# Altium PCB L1211 TOP V2.0.PcbDoc
Units mm, origin at the board's own origin, x right, y up, seen from the top; angles counter-clockwise.
Board outline 57.3 x 42.5 mm, 2 copper layers (Top Layer, Bottom Layer), stack 0.325 mm thick; 114 components, 65 nets, 318 pads, 231 vias.
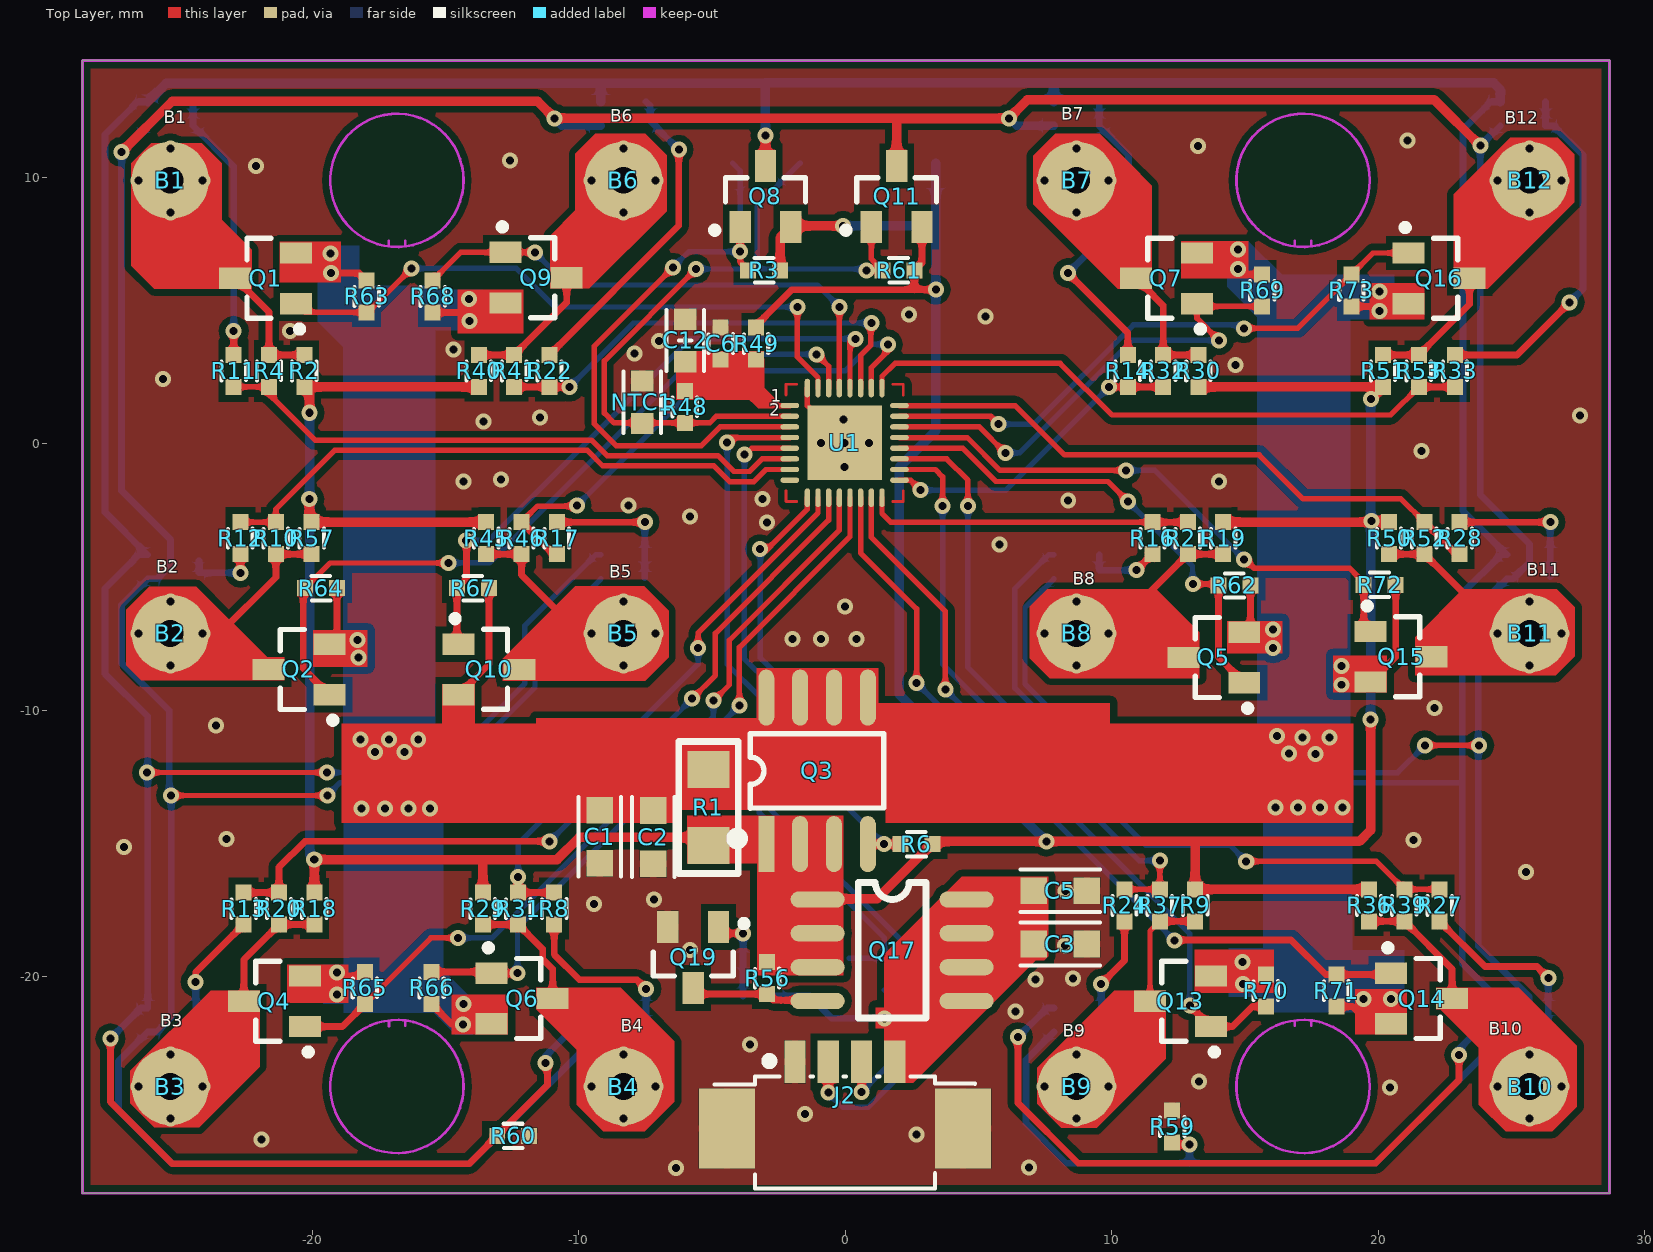
[diagram p0: Top Layer view]
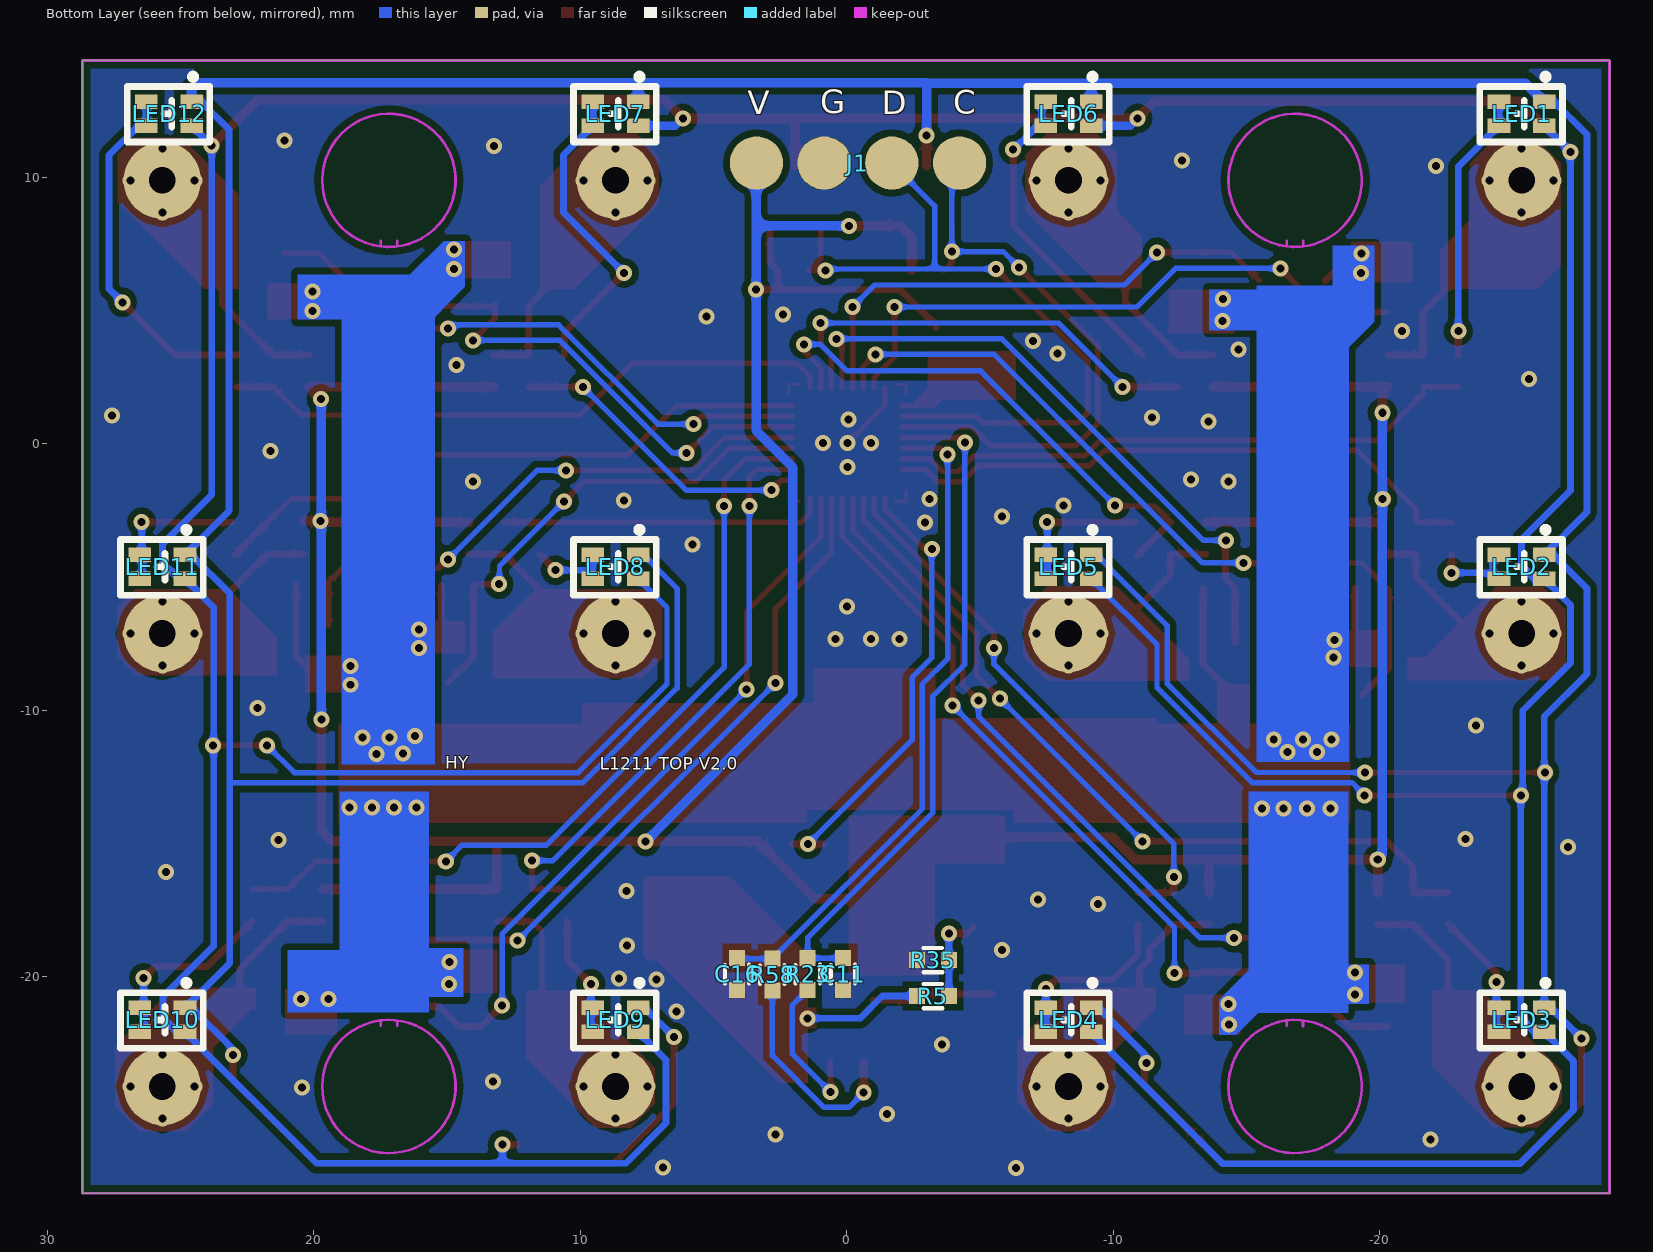
[diagram p1: Bottom Layer view, seen from below]

## Layer stack, top to bottom
Top Solder: solder mask 0.0102, Solder Resist, Dk 3.5
Top Layer: signal copper 0.0356
Dielectric 1: core 0.254, FR-4, Dk 4.2
Bottom Layer: signal copper 0.0356
Bottom Solder: solder mask 0.0102, Solder Resist, Dk 3.5

## Board outline
-28.614,-28.12 -28.614,14.38 28.686,14.38 28.686,-28.12

## Design rules (kind name [scope] priority, off if disabled: settings)
Clearance Poly [InPolygon] p1: gap=0.254
Clearance [All] p2: gap=0.178
MinimumSolderMaskSliver [All] p1: minsoldermaskwidth=0.025
PolygonConnect [isvia] p1: connectstyle=Direct reliefconductorwidth=0.254 reliefentries=4 polygonreliefangle="90 Angle" airgapwidth=0.254
RoutingVias [All] p1: holewidth=0.4 width=0.8 viastyle="Through Hole" minholewidth=0.3 minwidth=0.6 maxholewidth=0.6 maxwidth=1.2
SilkToSilkClearance [All] p1: silktosilkclearance=0.025
SilkToSolderMaskClearance [IsPad] p1: minsilkscreentomaskgap=0.025 clearancetoexposedcopper=TRUE
SolderMaskExpansion [All] p1: expansion=0.102
Width [All] p1: maxlimit=2.54 minlimit=0.203 preferedwidth=0.305
27 further rules are at their usual default settings.

## Components (designator, comment, footprint, x,y, rotation, side; value= is the part's Value field where it differs from the comment)
B1 "DC1" POPOPIN01 -25.314,9.88 r0 top locked
B2 "DC1" POPOPIN01 -25.314,-7.12 r0 top locked
B3 "DC1" POPOPIN01 -25.314,-24.12 r0 top
B4 "DC1" POPOPIN01 -8.314,-24.12 r0 top locked
B5 "DC1" POPOPIN01 -8.314,-7.12 r0 top locked
B6 "DC1" POPOPIN01 -8.314,9.88 r0 top locked
B7 "DC1" POPOPIN01 8.686,9.88 r0 top locked
B8 "DC1" POPOPIN01 8.686,-7.12 r0 top locked
B9 "DC1" POPOPIN01 8.686,-24.12 r0 top locked
B10 "DC1" POPOPIN01 25.686,-24.12 r0 top locked
B11 "DC1" POPOPIN01 25.686,-7.12 r0 top locked
B12 "DC1" POPOPIN01 25.686,9.88 r0 top locked
C1 "22uF/6.3V" 0805L -9.207,-14.748 r90 top
C2 "22uF/6.3V" 0805l -7.195,-14.761 r90 top
C3 "22uF/6.3V" 0805l 8.075,-18.775 r180 top
C5 "22uF/6.3V 0603" 0805l 8.075,-16.77 r180 top
C6 "104" R0402 -4.664,3.755 r270 top
C11 "104" R0402 0.15,-19.9 r90 bottom
C12 "22UF" "C 0603_L" -6,3.875 r270 top
C16 "104" R0402 4.125,-19.9 r90 bottom
J1 "shaolu-4P" shaolu-4P -0.414,10.53 r180 bottom
J2 "PTP-4P" PTP-4P 0,-24.445 r0 top
LED1 "2P" "LED 0606"#1 -25.314,12.38 r180 bottom locked
LED2 "2P" "LED 0606"#1 -25.314,-4.62 r180 bottom locked
LED3 "2P" "LED 0606"#1 -25.314,-21.62 r180 bottom locked
LED4 "2P" "LED 0606"#1 -8.314,-21.62 r180 bottom locked
LED5 "2P" "LED 0606"#1 -8.314,-4.62 r180 bottom locked
LED6 "2P" "LED 0606"#1 -8.314,12.38 r180 bottom locked
LED7 "2P" "LED 0606"#1 8.686,12.38 r180 bottom locked
LED8 "2P" "LED 0606"#1 8.686,-4.62 r180 bottom locked
LED9 "2P" "LED 0606"#1 8.686,-21.62 r180 bottom locked
LED10 "2P" "LED 0606"#1 25.686,-21.62 r180 bottom locked
LED11 "2P" "LED 0606"#1 25.686,-4.62 r180 bottom locked
LED12 "2P" "LED 0606"#2 25.686,12.38 r180 bottom locked
NTC1 "CMFA103J3950HANT" 0603L -7.614,1.555 r270 top
Q1 "AO3401" SOT23-3N -21.739,6.205 r90 top
Q2 "AO3401" SOT23-3N -20.489,-8.47 r90 top
Q3 "4435" SOP8_M -1.05,-12.275 r90 top
Q4 "AO3401" SOT23-3N -21.414,-20.92 r90 top
Q5 "AO3401" SOT23-3N 13.836,-8.02 r90 top
Q6 "AO3401" SOT23-3N -12.114,-20.82 r270 top
Q7 "AO3401" SOT23-3N 12.061,6.205 r90 top
Q8 "AO3401" SOT23-3N -2.985,9.28 r0 top
Q9 "AO3401" SOT23-3N -11.589,6.23 r270 top
Q10 "AO3401" SOT23-3N -13.364,-8.47 r270 top
Q11 "AO3401" SOT23-3N 1.936,9.28 r0 top
Q13 "AO3401" SOT23-3N 12.586,-20.92 r90 top
Q14 "AO3401" SOT23-3N 21.636,-20.82 r270 top
Q15 "AO3401" SOT23-3N 20.861,-7.995 r270 top
Q16 "AO3401" SOT23-3N 22.286,6.205 r270 top
Q17 "9435A" SOP8 -1,-17.075 r0 top
Q19 "SS8050" SOT23-3N -5.7,-19.275 r180 top
R1 "2R" "R 1206_L" -5.125,-13.625 r270 top
R2 "100K" R0402 -20.289,2.73 r270 top
R3 "10K" R0402 -3.039,6.505 r180 top
R4 "10K,1%" R0402 -21.614,2.73 r90 top
R5 "3K" R0402 -3.225,-20.725 r180 bottom
R6 "10K" R0402 2.675,-15.025 r0 top
R8 "5.2k" R0402 -10.914,-17.443 r90 top
R9 "100K" R0402 13.136,-17.32 r90 top
R10 "10K,1%" R0402 -21.356,-3.545 r270 top
R11 "5.2k" R0402 -22.939,2.73 r270 top
R12 "5.2k" R0402 -22.689,-3.545 r90 top
R13 "5.2k" R0402 -22.564,-17.443 r90 top
R14 "5.2k" R0402 10.611,2.73 r90 top
R16 "5.2k" R0402 11.536,-3.545 r270 top
R17 "5.2k" R0402 -10.814,-3.545 r270 top
R18 "100K" R0402 -19.914,-17.443 r90 top
R19 "100K" R0402 14.186,-3.545 r90 top
R20 "10K,1%" R0402 -21.239,-17.443 r270 top
R21 "10K,1%" R0402 12.861,-3.545 r270 top
R22 "5.2k" R0402 -11.089,2.73 r270 top
R23 "1K" R0402 1.475,-19.9 r90 bottom
R24 "5.2k" R0402 10.486,-17.32 r270 top
R27 "5.2k" R0402 22.311,-17.32 r270 top
R28 "5.2k" R0402 23.061,-3.545 r90 top
R29 "100K" R0402 -13.589,-17.443 r90 top
R30 "100K" R0402 13.261,2.73 r270 top
R31 "10K,1%" R0402 -12.264,-17.443 r270 top
R32 "10K,1%" R0402 11.936,2.73 r90 top
R33 "5.2k" R0402 22.886,2.73 r90 top
R35 "1K" R0402 -3.225,-19.375 r180 bottom
R36 "100K" R0402 19.661,-17.32 r90 top
R37 "10K,1%" R0402 11.811,-17.32 r270 top
R39 "10K,1%" R0402 20.986,-17.32 r270 top
R40 "100K" R0402 -13.739,2.73 r270 top
R41 "10K,1%" R0402 -12.414,2.73 r90 top
R45 "100K" R0402 -13.464,-3.545 r90 top
R46 "10K,1%" R0402 -12.139,-3.545 r270 top
R48 "10k" R0402 -6.014,1.381 r270 top
R49 "0R" R0402 -3.339,3.755 r90 top
R50 "100K" R0402 20.411,-3.545 r90 top
R51 "100K" R0402 20.186,2.73 r270 top
R52 "10K,1%" R0402 21.736,-3.545 r270 top
R53 "10K,1%" R0402 21.528,2.73 r90 top
R56 "10K" R0402 -2.925,-20.05 r90 top
R57 "100K" R0402 -20.014,-3.545 r90 top
R58 "1K" R0402 2.8,-19.925 r90 bottom
R59 "1k" R0402 12.275,-25.625 r270 top
R60 "1k" R0402 -12.45,-25.975 r0 top
R61 "10K" R0402 2.011,6.505 r180 top
R62 "10K" R0402 14.611,-5.32 r180 top
R63 "10K" R0402 -17.95,5.525 r270 top
R64 "10K" R0402 -19.664,-5.42 r180 top
R65 "10K" R0402 -18.014,-20.42 r270 top
R66 "10K" R0402 -15.514,-20.42 r90 top
R67 "10K" R0402 -13.964,-5.42 r180 top
R68 "10K" R0402 -15.475,5.525 r90 top
R69 "10K" R0402 15.65,5.75 r270 top
R70 "10K" R0402 15.786,-20.52 r270 top
R71 "10K" R0402 18.436,-20.52 r90 top
R72 "10K" R0402 20.061,-5.295 r180 top
R73 "10K" R0402 19,5.75 r90 top
U1 "SC8F096" QFN-32-4*4 -0.014,0.03 r0 top

## Footprints (in the part's own frame and the unit in brackets; to place one, negate y for a bottom-side part, rotate by r counter-clockwise, add the part's x,y. Pads: shape width x height; smd on the part's side, far side on the other; paste and mask are expansions set on the pad)
0603L [mm]
  rect 0.8x0.85 smd: 1(-0.8,0) 2(0.8,0)
  silkscreen extent -1.15,-0.7 1.15,0.7
0805L [mm]
  rect 1x1 smd: 1(-1,0) 2(1,0)
  silkscreen extent -1.5,-0.8 1.5,0.8
0805l [mm]
  rect 1x1 smd: 1(-1,0) 2(1,0)
  silkscreen extent -1.5,-0.8 1.5,0.8
"C 0603_L" [mm] "无极性贴片电容"
  rect 0.8x0.85 smd: 1(-0.8,0) 2(0.8,0)
  silkscreen extent -1.15,-0.7 1.15,0.7, body extent -0.72,-0.41 0.88,0.41, height 0.81
"LED 0606"#1 [mm]
  rect 0.85x0.55 smd: 1(0.85,0.45) 2(-0.85,0.45) 3(0.85,-0.45) 4(-0.85,-0.45)
  silkscreen extent -1.57,-1.06 1.53,1.49
"LED 0606"#2 [mm]
  rect 0.85x0.55 smd: 1(1.1,0.45) 2(-0.6,0.45) 3(1.1,-0.45) 4(-0.6,-0.45)
  silkscreen extent -1.32,-1.06 1.78,1.49
POPOPIN01 [mm] "铜柱/顶针焊盘"
  round 2.9 hole 1: 1(0,0)
  round 1.8 on Bottom Solder: 9(0,0)
PTP-4P [mm]
  rect 0.8x1.6 smd paste+0 mask+0.05: 1(-1.88,1.25) 2(-0.63,1.25) 3(0.62,1.25) 4(1.87,1.25)
  rect 2.1x3 smd paste+0 mask+0.05: 5(4.43,-1.25) 6(-4.43,-1.25)
  silkscreen extent -4.9,-3.5 4.87,1.43
QFN-32-4*4 [mm]
  oval 0.7x0.2 smd paste-100 mask+0.051: 1(-2.057,1.4) 2(-2.057,1) 3(-2.057,0.6) 4(-2.057,0.2) 5(-2.057,-0.2) 6(-2.057,-0.6) 7(-2.057,-1) 8(-2.057,-1.4) 17(2.057,-1.4) 18(2.057,-1) 19(2.057,-0.6) 20(2.057,-0.2) 21(2.057,0.2) 22(2.057,0.6) 23(2.057,1) 24(2.057,1.4)
  oval 0.2x0.7 smd paste-100 mask+0.051: 9(-1.4,-2.057) 10(-1,-2.057) 11(-0.6,-2.057) 12(-0.2,-2.057) 13(0.2,-2.057) 14(0.6,-2.057) 15(1,-2.057) 16(1.4,-2.057) 25(1.4,2.057) 26(1,2.057) 27(0.6,2.057) 28(0.2,2.057) 29(-0.2,2.057) 30(-0.6,2.057) 31(-1,2.057) 32(-1.4,2.057)
  rect 2.8x2.8 smd paste-100 mask+0.051: 33(0,0)
  Top Layer lines w0.1: -2.2,1.799 -2.2,2.2 -1.8,2.2 ; -2.2,-1.8 -2.2,-2.201 -1.8,-2.201 ; 1.8,-2.2 2.2,-2.2 2.2,-1.8 ; 1.8,2.2 2.2,2.2 2.2,1.8
  body extent -2.51,-2.54 2.51,2.48, height 0.8
R0402 [mm]
  rect 0.6x0.6 smd paste-100 mask+0.051: 1(-0.6,0) 2(0.6,0)
  silkscreen extent -0.36,-0.46 0.36,0.46
"R 1206_L" [mil] "1/4W贴片电阻"
  rect 55x62 smd: 1(-55.12,0) 2(57.09,0)
  silkscreen extent -96,-44 98,44, body extent -63,-31 63,32, height 22
shaolu-4P [mm]
  round 2 smd: 1(-3.81,0) 2(-1.27,0) 3(1.27,0) 4(3.81,0)
SOP8 [mil] "（蒜米工坊）"
  oval 80x24 smd: 1(-1,-1) 2(-1,-51) 3(-1,-101) 4(-1,-151) 5(219,-151) 6(219,-101) 7(219,-51) 8(219,-1)
  silkscreen extent 59,-176 159,24, body extent -4,-174 234,24, height 63
SOP8_M [mm] "5*6*1.8mm（长宽高）"
  rect 2.1x0.6 smd: 1(-2.75,1.905)
  oval 2.1x0.6 smd: 2(-2.75,0.635) 3(-2.75,-0.635) 4(-2.75,-1.905) 5(2.75,-1.905) 6(2.75,-0.635) 7(2.75,0.635) 8(2.75,1.905)
  silkscreen extent -2.69,-2.5 1.4,3.15, body extent -3,-2.5 3,2.5, height 1.9
SOT23-3N [mm] "3x1.3x1mm(长宽高)"
  rect 0.8x1.2 smd: 1(-0.95,-1.143) 2(0.95,-1.143) 3(0,1.143)
  silkscreen extent -2.03,-1.4 1.5,0.7

## Part data
B1 B2 B3 B4 B5 B6 B7 B8 B9 B10 B11 B12: library part dianchi1
C1 C2 C3 C5 C6 C11 C12 C16: library part C, "无极性贴片电容"
LED1 LED2 LED3 LED4 LED5 LED6 LED7 LED8 LED9 LED10 LED11 LED12: library part "LED RG-K", "共阴双色LED"
NTC1: library part RES2-R
Q1 Q2 Q4 Q5 Q6 Q7 Q8 Q9 Q10 Q11 Q13 Q14 Q15 Q16: library part SI2301, "P沟道场效应管"
Q3: library part 9435A
Q19: library part QNPN, "NPN Bipolar Transistor"
R1 R2 R3 R4 R5 R6 R8 R9 R10 R11 R12 R13 R14 R16 R17 R18 R19 R20 R21 R22 R23 R24 R27 R28 R29 R30 R31 R32 R33 R35 R36 R37 R39 R40 R41 R45 R46 R48 R49 R50 R51 R52 R53 R56 R57 R58 R59 R60 R61 R62 R63 R64 R65 R66 R67 R68 R69 R70 R71 R72 R73: library part R, "贴片电阻"
U1: library part SC8F096AD832NPR

## Free pads (board coordinates)
  round 0.3 on Mech1: 6(-8.314,-7.12)
  round 0.5 on Top Overlay: 7(-2.764,2.355)

## Via types
v1: diameter 0.6, hole 0.3, Top Layer to Bottom Layer, tented both sides, 178 vias
v2: diameter 0.6, hole 0.3, Top Layer to Bottom Layer, 48 vias
v3: diameter 0.61, hole 0.305, Top Layer to Bottom Layer, tented both sides, 5 vias

## Nets (pads, with @x,y where several pads share a name; then routed paths per layer and width w, separated by ;. In a path a pad name is that pad's centre, name@x,y a point inside that pad or via, vN(x,y) a via of type N, cw(c..) or ccw(c..) an arc to the next point about the centre after c; other vN are vias at no path point)
B1: Q1.1 R63.2 U1.31 | length 23.1
  Top Layer w0.203: Q1.1@-20.266,4.925 R63.2 -17.925,4.925 v1(-16.275,6.575) ; v1(-1.789,5.13) -1.789,3.255 -1.014,2.48 U1.31
  Bottom Layer w0.203: v1(-16.275,6.575) -16.27,6.58 -12.33,6.58 -10.88,5.13 v1(-1.789,5.13)
B1AD: R4.1 R11.2 U1.6 | length 22.5
  Top Layer w0.203: R11.2 R4.1 -21.614,1.856 -19.889,0.13 -9.514,0.13 -8.933,-0.451 -4.768,-0.451 -4.175,-1.044 -3.583,-1.044 -3.109,-0.57 U1.6
B2: Q2.1 R64.2 U1.30 | length 28.7
  Top Layer w0.203: R64.2 -19.322,-4.478 -14.878,-4.478 v1(-14.876,-4.475) ; v1(-1.064,3.356) -0.614,2.905 U1.30
  Top Layer w0.254: R64.2 -20.327,-5.483 -20.327,-8.439 Q2.1
  Bottom Layer w0.203: v1(-14.876,-4.475) -13.344,-4.474 -10.514,-1.645 -5.514,3.356 v1(-1.064,3.356)
B2AD: R10.1 R12.2 U1.7 | length 22.7
  Top Layer w0.203: R12.2 R10.1 -21.356,-2.456 -19.151,-0.251 -9.672,-0.251 -9.091,-0.832 -4.926,-0.832 -4.333,-1.425 -3.425,-1.425 -2.97,-0.97 U1.7
B3: Q4.1 R65.2 U1.12 | length 30.3
  Top Layer w0.203: R65.2 -15.539,-18.545 v1(-14.514,-18.545) ; v1(-4.939,-9.645) -4.345,-9.051 -4.345,-7.376 -0.214,-3.245 U1.12
  Top Layer w0.254: Q4.1 -18.864,-21.87 R65.2
  Bottom Layer w0.203: v1(-14.514,-18.545) -13.245,-18.545 -4.939,-10.239 v1(-4.939,-9.645)
B3AD: R13.2 R20.1 U1.11 | length 30.1
  Top Layer w0.203: v1(-5.739,-9.57) -4.864,-8.695 -4.864,-7.12 -0.614,-2.87 U1.11
  Top Layer w0.254: R13.2 R20.1 -21.239,-15.889 -20.27,-14.92 v1(-11.089,-14.92)
  Bottom Layer w0.203: v1(-11.089,-14.92) v1(-5.739,-9.57)
B4: Q6.1 R66.2 U1.13 | length 26.2
  Top Layer w0.203: v1(-3.964,-9.82) -3.964,-7.639 0.186,-3.489 U1.13
  Top Layer w0.254: R66.2 Q6.1@-13.307,-19.82 ; Q6.1 v1(-12.289,-19.87)
  Bottom Layer w0.203: v1(-12.289,-19.87) -12.289,-18.145 v1(-3.964,-9.82)
B4AD: R8.2 R31.1 U1.10 | length 20.8
  Top Layer w0.203: v1(-5.514,-7.67) -5.514,-7.095 -1.014,-2.595 U1.10
  Top Layer w0.254: v1(-12.264,-16.261) R31.1 R8.2
  Bottom Layer w0.203: v1(-12.264,-16.261) -12.265,-15.021 -5.514,-8.27 v1(-5.514,-7.67)
B5: Q10.1 R67.2 U1.28 | length 23.7
  Top Layer w0.203: U1.28 0.186,3.735 v1(0.386,3.935)
  Top Layer w0.254: Q10.1@-14.564,-7.463 R67.2 -14.2,-5.056 -14.2,-3.651 v1(-14.226,-3.625)
  Bottom Layer w0.203: v1(-14.226,-3.625) -13.369,-3.625 -12.97,-3.226 -5.809,3.935 v1(0.386,3.935)
B5AD: R17.2 R46.1 U1.26 | length 20.2
  Top Layer w0.203: R46.1 -11.539,-2.345 -10.09,-2.345 v1(-10.065,-2.32) ; U1.26 0.986,2.855 1.611,3.48 v1(1.611,3.73)
  Top Layer w0.254: R46.1 R17.2@-10.889,-4.195
  Bottom Layer w0.203: v1(-10.065,-2.32) -5.015,2.73 0,2.73 1,3.73 v1(1.611,3.73)
B6: Q9.1 R68.2 U1.29 | length 19.6
  Top Layer w0.203: R68.2 -14.42,7.18 Q9.1 v1(-11.639,7.18) ; U1.29 v1(-0.214,5.13)
  Bottom Layer w0.203: v1(-11.639,7.18) -10.414,5.955 -1.039,5.955 v1(-0.214,5.13)
B6AD: R22.2 R41.1 U1.27 | length 17
  Top Layer w0.203: U1.27 0.586,3.316 0.965,3.695 v1@0.965,4.509
  Top Layer w0.254: R41.1 R22.2 v1(-10.339,2.13)
  Bottom Layer w0.203: v1(-10.339,2.13) -7.939,4.53 v1(0.986,4.53)
B7: Q7.1 R69.2 U1.22 | length 18.2
  Top Layer w0.203: U1.22 5.036,0.63 v1(6.011,-0.345) ; Q7.1 13.204,4.712 v1(14.036,3.88) ; Q7.1@13.309,5.15 R69.2
  Bottom Layer w0.203: v1(6.011,-0.345) 6.55,-0.345 10.775,3.88 v1(14.036,3.88)
B7AD: R14.1 R32.1 U1.17 | length 11.7
  Top Layer w0.203: U1.17 2.461,-1.37 v1(2.836,-1.745) ; v1(9.911,2.13) R14.1
  Top Layer w0.254: R14.1 R32.1
  Bottom Layer w0.203: v1(2.836,-1.745) 6.036,-1.745 v1(9.911,2.13)
B8: Q5.1 R62.2 U1.20 | length 18.5
  Top Layer w0.203: U1.20 4.411,-0.17 5.661,-1.42 9.861,-1.42 v1(10.611,-2.17) ; v1(13.061,-5.27) R62.2@13.961,-5.27
  Top Layer w0.254: R62.2 14.011,-8.002 Q5.1
  Bottom Layer w0.203: v1(10.611,-2.17) 13.036,-4.595 13.036,-5.245 v1(13.061,-5.27)
B8AD: R16.1 R21.1 U1.16 | length 12.2
  Top Layer w0.203: U1.16 1.386,-2.62 1.711,-2.945 R16.1
  Top Layer w0.254: R16.1 R21.1
B9: Q13.1 R70.2 U1.15 | length 27.5
  Top Layer w0.203: U1.15 0.986,-3.52 3.761,-6.295 v1(3.761,-9.22)
  Top Layer w0.254: v1(12.936,-21.077) Q13.1 14.536,-21.87 15.286,-21.12 R70.2
  Bottom Layer w0.203: v1(3.761,-9.22) 12.936,-18.395 v1(12.936,-21.077)
B9AD: R24.1 R37.1 U1.18 | length 22.4
  Top Layer w0.203: U1.18 3.386,-0.97 3.661,-1.245 v1(3.661,-2.345) ; R24.1 R37.1 v1(11.811,-15.645)
  Bottom Layer w0.203: v1(3.661,-2.345) 3.661,-8.27 11.036,-15.645 v1(11.811,-15.645)
B10: Q14.1 R71.2 U1.14 | length 30.1
  Top Layer w0.203: U1.14 0.586,-4.095 2.686,-6.195 v1(2.686,-8.979)
  Top Layer w0.254: v1(12.356,-18.65) 12.387,-18.62 16.736,-18.62 18.036,-19.92 R71.2 Q14.1@20.443,-19.92
  Bottom Layer w0.203: v1(2.686,-8.979) v1(12.356,-18.65)
B10AD: R27.1 R39.1 U1.19 | length 31.1
  Top Layer w0.203: U1.19 3.811,-0.57 4.611,-1.37 v1(4.611,-2.345) ; v3@15.05,-15.67 19.936,-15.67 R39.1 R27.1
  Bottom Layer w0.203: v1(4.611,-2.345) 4.611,-8.395 11.281,-15.066 14.441,-15.066 v3(15.05,-15.675)
B11: Q15.1 R72.2 U1.21 | length 21.3
  Top Layer w0.203: U1.21 4.586,0.23 5.817,-1.001 v1(10.55,-1.001) ; v1(14.976,-4.35) 15.025,-4.35 15.35,-4.675 18.941,-4.675 19.461,-5.195 R72.2
  Top Layer w0.254: Q15.1@19.461,-6.788 R72.2
  Bottom Layer w0.203: v1(10.55,-1.001) 11.626,-1.001 v1(14.976,-4.35)
B11AD: R28.1 R52.1 U1.24 | length 23.2
  Top Layer w0.203: U1.24 6.386,1.43 8.236,-0.42 15.536,-0.42 17.186,-2.07 20.861,-2.07 R52.1
  Top Layer w0.254: R52.1 R28.1@22.961,-4.17
B12: Q16.1 R73.2 U1.23 | length 22.1
  Top Layer w0.203: U1.23 5.461,1.03 v1(5.761,0.73) ; v1(14.962,4.331) 16.981,4.331 R73.2 19.805,7.155 Q16.1
  Bottom Layer w0.203: v1@5.711,0.68 v1(5.761,0.73) 7.086,0.73 10.815,4.459 14.833,4.459 v1(14.962,4.331)
B12AD: R33.1 R53.1 U1.25 | length 23.4
  Top Layer w0.203: U1.25 1.386,2.53 1.873,3.018 8.073,3.018 10.016,1.075 20.472,1.075 R53.1
  Top Layer w0.254: R53.1 R33.1
"CD IO1": C11.2 R23.2 U1.4 | length 25.5
  Top Layer w0.203: v1(-4.424,0.051) -4.245,0.23 U1.4
  Bottom Layer w0.203: v1(-4.424,0.051) -4.424,-8.276 -3.213,-9.487 -3.213,-13.851 1.475,-18.539 R23.2 C11.2
"CD IO2": C16.2 R58.2 U1.5 | length 24.7
  Top Layer w0.203: v1(-3.775,-0.4) -3.725,-0.4 -3.495,-0.17 U1.5
  Bottom Layer w0.203: v1(-3.775,-0.4) -3.775,-3.7 -3.775,-8.075 -2.825,-9.025 -2.825,-13.7 R58.2 C16.2@4.1,-19.325
CLK: J1.4 Q8.1 R3.2 U1.3 | length 23
  Top Layer w0.203: v1(-6.464,6.605) -9.414,3.655 -9.414,0.755 -8.589,-0.07 -5.389,-0.07 -4.689,0.63 U1.3 ; Q8.1 v1(-3.935,7.205) -3.935,6.801 R3.2
  Bottom Layer w0.203: v1(-6.464,6.605) -5.864,7.205 v1(-3.935,7.205) -3.935,10.241 J1.4
DAT: J1.3 NTC1.2 Q11.1 R48.2 R61.2 U1.2 | length 27.5
  Top Layer w0.203: v1(-5.589,6.555) -9.033,3.111 -9.033,1.149 -8.665,0.781 R48.2 -5.077,0.781 -4.828,1.03 U1.2 ; v1(0.805,6.505) R61.2 0.986,6.93 Q11.1
  Bottom Layer w0.203: v1(-5.589,6.555) -3.291,6.555 ; J1.3 -3.291,8.924 -3.291,6.555 ; v1(0.805,6.505) 0.755,6.555 -3.291,6.555
EN: Q3.4 R6.1 U1.9 | length 17
  Top Layer w0.203: v1(-3.194,-3.956) -2.914,-3.956 -1.414,-2.456 U1.9
  Top Layer w0.254: Q3.4 v1(1.465,-15.025) R6.1
  Bottom Layer w0.203: v1(-3.194,-3.956) -3.175,-3.975 -3.175,-8.043 -2.444,-8.774 -2.444,-11.116 v1(1.465,-15.025)
GND: C1.1 C2.1 C3.1 C5.1 C6.1 C11.1 C12.1 C16.1 J1.2 J2.1 J2.5 J2.6 NTC1.1 Q19.2 R35.1 R59.1 R60.2 U1.32 U1.33 | length 2.6
  Top Layer w0.203: U1.32 -1.414,1.43 v1(-0.014,0.03)
  other v1: -6.35,-27.175 6.9,-27.15 -21.9,-26.1 2.675,-25.925 -1.5,-25.15 20.45,-24.15 13.275,-23.925 -3.575,-22.55 6.4,-21.3 7.15,-20.1 8.55,-20.075 -5.825,-19 8.25,-18.825 -9.425,-17.275 -7.175,-17.1 8.275,-16.775 25.55,-16.075 -27.05,-15.125 21.325,-14.875 -23.2,-14.825 -23.6,-10.575 22.125,-9.925 -1.975,-7.325 -0.9,-7.325 0.425,-7.325 0,-6.1 5.8,-3.775 -2.925,-2.95 -5.825,-2.725 -8.125,-2.325 8.375,-2.125 -3.1,-2.075 -14.325,-1.425 14.025,-1.425 -12.9,-1.35 -0.025,-0.875 21.625,-0.275 -0.9,0.025 0.9,0.025 -13.575,0.825 -0.05,0.9 -11.45,0.975 27.575,1.05 -25.6,2.425 14.65,2.95 -7.9,3.375 -14.7,3.525 -6.975,3.85 -20.825,4.225 5.275,4.775 2.4,4.85 -22.1,10.425 -12.575,10.625 13.25,11.175 21.1,11.375
"LED VCC1": LED1.3 LED2.3 LED3.3 LED4.3 LED5.3 LED6.3 LED7.3 LED8.3 LED9.3 LED10.3 LED11.3 LED12.3 Q11.3 R59.2 | length 231.2
  Top Layer w0.203: v1(-25.283,-13.2) v1(-19.425,-13.2) ; v1(21.761,-11.32) v1(23.786,-11.32)
  Top Layer w0.254: R59.2@12.35,-26.3 v1(12.925,-26.3)
  Top Layer w0.356: v1(-27.145,10.949) -25.244,12.85 -11.536,12.85 -10.897,12.212 6.149,12.212 6.838,12.9 22.116,12.9 v1(23.836,11.18) ; Q11.3 1.936,12.2 v1(6.161,12.2)
  Bottom Layer w0.203: v1(-19.425,-13.2) -18.945,-12.72 -15.2,-12.72 -11.633,-9.153 -11.633,-7.539 LED5.3 ; LED8.3 6.753,-6.153 6.753,-9.012 10.086,-12.345 20.736,-12.345 v1(21.761,-11.32)
  Bottom Layer w0.254: LED1.3 v1(-27.145,10.949) -27.145,-1.764 -25.314,-3.595 -25.314,-4.559 -25.825,-5.07 LED2.3 -27.145,-6.051 -27.145,-8.225 -25.358,-10.012 v1@-25.358,-13.125 ; v1(-25.283,-13.2) -25.283,-21.528 -25.825,-22.07 LED3.3 -27.264,-23.17 -27.264,-24.995 -25.239,-27.02 -14.114,-27.02 LED4.3 ; LED9.3 6.786,-23.12 6.786,-25.495 8.29,-26.999 12.925,-26.999 ; v1(12.925,-26.3) 12.925,-26.999 ; LED12.3 v1(23.836,11.18) 23.836,-1.92 25.686,-3.77 25.686,-4.451 25.067,-5.07 LED11.3 23.761,-6.145 23.761,-18.845 25.661,-20.745 25.661,-21.545 25.136,-22.07 LED10.3 19.906,-26.999 12.925,-26.999
  Bottom Layer w0.305: v1(-10.909,12.2) -10.639,11.93 LED6.3 ; v1(6.161,12.2) 6.431,11.93 LED7.3
"LED VCC2": LED1.1 LED2.1 LED3.1 LED4.1 LED5.1 LED6.1 LED7.1 LED8.1 LED9.1 LED10.1 LED11.1 LED12.1 Q8.3 R60.1 | length 229.2
  Top Layer w0.203: v1(-26.189,-12.339) v1(-19.436,-12.339)
  Top Layer w0.254: v1(-27.564,-22.32) -27.564,-24.695 -25.239,-27.02 -14.114,-27.02 -11.164,-24.07 -11.164,-23.321 v1(-11.24,-23.246) ; v1(6.486,-22.27) 6.486,-24.736 8.749,-26.999 19.906,-26.999 23.036,-23.87 v1(23.036,-22.945)
  Top Layer w0.305: v1(-2.989,11.556) v1@-2.985,11.552
  Top Layer w0.356: Q8.3 v1@-2.985,11.552
  Bottom Layer w0.203: v1(-19.436,-12.339) -15.358,-12.339 -12.014,-8.995 -12.014,-6.825 -9.359,-4.17 LED5.1 ; LED8.1 7.641,-4.17 6.372,-5.439 6.372,-9.17 9.928,-12.726 23.131,-12.726 23.137,-12.72
  Bottom Layer w0.254: v1(-27.564,-22.32) -26.414,-21.17 LED3.1 -26.164,-10.236 -27.764,-8.636 -27.764,-5.431 -26.503,-4.17 LED2.1 -27.764,-2.57 -27.764,11.605 -26.539,12.83 LED1.1 ; v1(-11.24,-23.246) -11.24,-22.97 -9.439,-21.17 LED4.1 ; v1(6.486,-22.27) 7.586,-21.17 LED9.1 ; v1(23.036,-22.945) 23.036,-22.72 24.586,-21.17 LED10.1 23.156,-19.49 23.156,-5.618 24.605,-4.17 LED11.1 23.186,-2.52 23.186,11.786 24.23,12.83 LED12.1
  Bottom Layer w0.356: LED1.1 -25.469,13.525 -2.989,13.525 v1(-2.989,11.556) ; LED6.1 -9.164,13.461 ; -2.989,13.536 24.339,13.536 24.586,13.289 LED12.1 ; LED7.1 7.836,13.525
NetB1_1: B1.1 Q1.3 R2.1 R4.2 | length 4.7
  Top Layer w0.254: Q1.3 -21.614,4.937 R4.2 R2.1
  other v2: -25.314,8.68 -26.514,9.88 -24.114,9.88 -25.314,11.08
NetB2_1: B2.1 Q2.3 R10.2 R57.1 | length 7
  Top Layer w0.254: B2.1 -23.464,-7.12 -21.356,-5.012 R10.2 R57.1
  other v2: -25.314,-8.32 -26.514,-7.12 -24.114,-7.12 -25.314,-5.92
NetB3_1: B3.1 Q4.3 R18.1 R20.2 | length 4.7
  Top Layer w0.254: Q4.3 -22.557,-19.361 R20.2 R18.1
  other v2: -25.314,-25.32 -26.514,-24.12 -24.114,-24.12 -25.314,-22.92
NetB4_1: B4.1 Q6.3 R29.1 R31.2 | length 4.6
  Top Layer w0.254: R29.1 R31.2 -11.346,-18.962 -11.346,-19.34 -10.971,-19.715 Q6.3
  other v2: -8.314,-25.32 -9.514,-24.12 -7.114,-24.12 -8.314,-22.92
NetB5_1: B5.1 Q10.3 R45.1 R46.2 | length 6.8
  Top Layer w0.254: R45.1 R46.2 -12.139,-4.92 -9.939,-7.12 B5.1
  other v2: -8.314,-8.32 -9.514,-7.12 -7.114,-7.12 -8.314,-5.92
NetB6_1: B6.1 Q9.3 R40.1 R41.2 | length 5
  Top Layer w0.254: R40.1 R41.2 -10.446,5.298 Q9.3
  other v2: -8.314,8.68 -9.514,9.88 -7.114,9.88 -8.314,11.08
NetB7_1: B7.1 Q7.3 R30.1 R32.2 | length 4.6
  Top Layer w0.254: Q7.3 11.936,5.187 R32.2 R30.1
  other v2: 8.686,8.68 7.486,9.88 9.886,9.88 8.686,11.08
NetB8_1: B8.1 Q5.3 R19.1 R21.2 | length 5.5
  Top Layer w0.254: v2(9.886,-7.12) R21.2 R19.1
  other v2: 8.686,-8.32 7.486,-7.12 8.686,-5.92
NetB9_1: B9.1 Q13.3 R9.1 R37.2 | length 4.5
  Top Layer w0.203: Q13.3 11.443,-18.288 R37.2
  Top Layer w0.254: R37.2 R9.1
  other v2: 8.686,-25.32 7.486,-24.12 9.886,-24.12 8.686,-22.92
NetB10_1: B10.1 Q14.3 R36.1 R39.2 | length 5
  Top Layer w0.254: R36.1 R39.2 22.779,-19.713 Q14.3
  other v2: 25.686,-25.32 24.486,-24.12 26.886,-24.12 25.686,-22.92
NetB11_1: B11.1 Q15.3 R50.1 R52.2 | length 5.5
  Top Layer w0.254: R50.1 R52.2 B11.1@24.711,-7.12
  other v2: 25.686,-8.32 24.486,-7.12 26.886,-7.12 25.686,-5.92
NetB12_1: B12.1 Q16.3 R51.1 R53.2 | length 5
  Top Layer w0.254: R51.1 R53.2 23.429,5.231 Q16.3
  other v2: 25.686,8.68 24.486,9.88 26.886,9.88 25.686,11.08
NetC6_2: C6.2 C12.2 R48.1 R49.1 U1.1 | length 0.9
  Top Layer w0.203: -2.989,1.43 U1.1
NetJ2_2: J2.2 R58.1 | length 8
  Top Layer w0.305: v1(-0.63,-24.345) J2.2
  Bottom Layer w0.203: v1(-0.63,-24.345) -0.076,-24.899 0.86,-24.899 2.8,-22.959 R58.1
NetJ2_3: J2.3 R23.1 | length 5.8
  Top Layer w0.203: v1(0.62,-24.32) J2.3
  Bottom Layer w0.203: v1(0.62,-24.32) 2.054,-22.885 2.054,-21.079 R23.1
NetLED1_2: LED1.2 LED1.4 R11.1 | length 10.1
  Top Layer w0.254: R11.1 v1(-22.939,4.23)
  Bottom Layer w0.254: LED1.2 LED1.4 -22.939,10.405 v1(-22.939,4.23)
NetLED2_2: LED2.2 LED2.4 R12.1 | length 2.7
  Top Layer w0.254: v1(-22.689,-4.845) R12.1
  Bottom Layer w0.254: LED2.2@-24.239,-4.395 -24.239,-4.845 v1(-22.689,-4.845)
NetLED3_2: LED3.2 LED3.4 R13.1 | length 4.7
  Top Layer w0.254: v1(-24.364,-20.195) -24.364,-19.843 R13.1
  Bottom Layer w0.254: LED3.4@-24.364,-21.97 v1(-24.364,-20.195)
NetLED4_2: LED4.2 LED4.4 R8.1 | length 6.7
  Top Layer w0.254: R8.1 -10.914,-19.161 -9.96,-20.115 -7.81,-20.115 v1(-7.464,-20.461)
  Bottom Layer w0.254: LED4.4 LED4.2 v1(-7.464,-20.461)
NetLED5_2: LED5.2 LED5.4 R17.1 | length 5.4
  Top Layer w0.254: R17.1 v1(-7.514,-2.945)
  Bottom Layer w0.254: LED5.4@-7.514,-5.02 v1(-7.514,-2.945)
NetLED6_2: LED6.2 LED6.4 R22.1 | length 12
  Top Layer w0.254: R22.1 -6.239,8.18 v1(-6.239,11.03)
  Bottom Layer w0.254: LED6.2 -7.307,12.673 -7.307,12.098 v1(-6.239,11.03)
NetLED7_2: LED7.2 LED7.4 R14.2 | length 11.8
  Top Layer w0.254: v1(8.361,6.406) 10.611,4.155 R14.2
  Bottom Layer w0.254: v1(8.361,6.406) 10.636,8.68 10.636,10.83 LED7.4 LED7.2
NetLED8_2: LED8.2 LED8.4 R16.2 | length 2.8
  Top Layer w0.254: v1(10.936,-4.745) R16.2
  Bottom Layer w0.254: LED8.2 9.536,-4.745 v1(10.936,-4.745)
NetLED9_2: LED9.2 LED9.4 R24.2 | length 4.4
  Top Layer w0.254: v1(9.611,-20.27) 10.486,-19.395 R24.2
  Bottom Layer w0.254: LED9.4@9.611,-21.995 v1(9.611,-20.27)
NetLED10_2: LED10.2 LED10.4 R27.2 | length 6.8
  Top Layer w0.254: R27.2 24.011,-19.62 25.961,-19.62 v1(26.386,-20.045)
  Bottom Layer w0.254: LED10.4@26.386,-21.92 v1(26.386,-20.045)
NetLED11_2: LED11.2 LED11.4 R28.2 | length 5.5
  Top Layer w0.254: R28.2 v1(26.461,-2.945)
  Bottom Layer w0.254: LED11.4@26.461,-4.995 v1(26.461,-2.945)
NetLED12_2: LED12.2 LED12.4 R33.2 | length 13.6
  Top Layer w0.254: R33.2 25.211,3.33 v1(27.186,5.305)
  Bottom Layer w0.254: LED12.2 LED12.4 26.586,11.93 27.686,10.83 27.686,5.805 v1(27.186,5.305)
NetQ17_4: Q17.4 Q19.3 R56.1 | length 4.6
  Top Layer w0.254: Q19.3@-5.468,-20.65 R56.1 -2.69,-20.885 Q17.4@-1,-20.885
NetQ19_1: Q19.1 R5.2 R35.2 | length 3.4
  Top Layer w0.254: Q19.1 -4.507,-18.375 v1(-3.825,-18.375)
  Bottom Layer w0.254: R5.2 R35.2 v1(-3.825,-18.375)
VCC: J1.1 Q3.1 Q3.2 Q3.3 Q8.2 Q11.2 Q17.1 Q17.2 Q17.3 R1.2 R2.2 R3.1 R6.2 R9.2 R18.2 R19.2 R29.2 R30.2 R36.2 R40.2 R45.2 R49.2 R50.2 R51.2 R56.2 R57.2 R61.1 | length 154.3
  Top Layer w0.254: R49.2 -3.339,4.435 -1.994,5.78 2.6,5.78 ; Q11.2 2.886,6.78 R61.1 2.6,6.494 2.6,5.78 ; v1(3.411,5.78) 2.6,5.78
  Top Layer w0.356: R57.2@-20.1,-2.859 v3(-20.1,-2.075) ; v3(-20.092,1.159) -20.092,1.933 R2.2 R40.2 ; R57.2 R45.2 ; R18.2 v3(-19.914,-15.605) -10.805,-15.605 -9.975,-14.775 R1.2@-5.425,-14.775 ; R29.2 -13.589,-15.669 ; R3.1 -2.439,7.733 Q8.2 -1.997,8.175 v1(-0.075,8.175) ; Q17.1@-1,-17.075 1.2,-17.075 3.35,-14.925 v1(7.55,-14.925) 19.3,-14.925 19.725,-14.5 v1(19.725,-10.35) ; 13.136,-15.014 R9.2 R36.2 ; R30.2 R51.2@20.181,2.13 ; R19.2 v3@19.705,-2.945 ; v1(19.726,1.675) R51.2@20.181,2.13 ; v3(19.75,-2.9) R50.2@20.366,-2.9 ; R51.2 R51.2@20.181,2.13
  Bottom Layer w0.356: v3(-20.092,1.159) -20.092,-15.428 v3(-19.914,-15.605) ; v1(-0.075,8.175) 3.411,8.175 ; J1.1@3.411,10.515 3.411,8.175 ; v1(7.55,-14.925) 2.025,-9.4 2.025,-0.896 3.411,0.49 v1(3.411,5.78) 3.411,8.175 ; v1(19.725,-10.35) 19.725,1.674 v1(19.726,1.675)
VCC1: C1.2 C2.2 Q1.2 Q2.2 Q3.5 Q3.6 Q3.7 Q3.8 Q4.2 Q5.2 Q6.2 Q7.2 Q9.2 Q10.2 Q13.2 Q14.2 Q15.2 Q16.2 R1.1 R62.1 R63.1 R64.1 R65.1 R66.1 R67.1 R68.1 R69.1 R70.1 R71.1 R72.1 R73.1 | length 25.3
  Top Layer w0.254: Q4.2 -18.164,-19.97 R65.1 ; v1(-19.289,6.405) -18.23,6.405 R63.1 ; Q2.2@-19.064,-7.238 R64.1 ; R66.1 -14.764,-21.77 Q6.2 ; R68.1 -14.225,4.925 ; Q10.2 -13.364,-8.277 R67.1 ; Q13.2@13.779,-19.92 R70.1 ; v1@14.941,6.35 R69.1 ; Q5.2@15.211,-6.838 R62.1 ; R71.1 19.036,-21.12 19.686,-21.77 Q14.2 ; R73.1 v1@19.825,5.15 ; Q15.2 20.661,-8.002 R72.1
  other v1: -14.339,-21.795 -14.314,-21.02 19.461,-20.845 20.486,-20.845 -19.064,-20.67 14.936,-20.27 -19.064,-19.845 14.911,-19.445 -18.139,-13.695 -17.264,-13.695 -16.389,-13.695 -15.564,-13.695 16.146,-13.655 16.996,-13.655 17.821,-13.655 18.671,-13.655 17.661,-11.645 16.661,-11.62 -17.639,-11.57 -16.539,-11.57 -18.189,-11.095 -17.114,-11.095 -16.014,-11.095 17.161,-11.02 18.186,-11.02 16.211,-10.97 18.636,-9.045 18.636,-8.345 -18.264,-8.02 16.061,-7.67 -18.289,-7.37 16.061,-6.97 -14.089,4.605 20.061,4.98 -14.114,5.43 20.061,5.705 14.736,6.555 -19.314,7.13 14.736,7.28
VIN: C3.2 C5.2 J2.4 Q17.5 Q17.6 Q17.7 Q17.8 R5.1 | length 4.4
  Bottom Layer w0.254: R5.1 -1.325,-20.725 -0.487,-21.563 v1(1.475,-21.563)
VT_PWM1: U1.8
pads on no net: B1.9 B2.9 B3.9 B4.9 B5.9 B6.9 B7.9 B8.9 B9.9 B10.9 B11.9 B12.9

## Polygon pours and split planes (outlines as drawn)
GND on Bottom Layer "Top Layer-No Net" (solid, remove dead copper, pour order 26): -30.125,15.75 29.05,15.75 30.25,14.55 29.9,14.2 29.9,-29.1 -29.075,-29.1 -29.55,-28.625
GND on Top Layer "Top Layer-No Net" (solid, remove dead copper, pour order 28): -29.3,14.95 -29.2,15.05 29.15,15.05 29.15,-28.325 28.55,-28.925 28.35,-28.725 -29.05,-28.725

## Keep-outs
Keep-Out Layer:
  circle w0.1: c-16.814,-24.12 r2.5
  circle w0.1: c-16.814,9.88 r2.5
  circle w0.1: c17.186,-24.12 r2.5
  circle w0.1: c17.186,9.88 r2.5
  lines w0.1: -17.127,7.425 -17.127,7.604 ; -17.114,-21.855 -17.114,-21.663 ; -16.501,-21.843 -16.501,-21.665 ; -16.501,7.425 -16.501,7.604 ; 16.873,-21.843 16.873,-21.665 ; 16.873,7.425 16.873,7.604 ; 17.499,-21.843 17.499,-21.665 ; 17.499,7.425 17.499,7.604 ; -28.614,14.38 28.686,14.38 ; -28.614,14.38 28.686,14.38 ; -28.614,14.38 -28.614,-28.12 28.686,-28.12 ; 28.686,-28.12 28.686,14.38 ; 28.686,-28.12 28.686,14.38

## Other copper
Top Layer:
  rectangle net VCC1: 19.136,-22.17 21.086,-20.47
  rectangle net VCC1: 13.111,-20.62 16.086,-18.97
  rectangle net VCC1: 14.336,-7.87 16.411,-6.645
  rectangle net VCC1: 18.311,-9.345 20.336,-7.945
  rectangle net VCC1: 12.611,6.205 15.136,7.605
  rectangle net VCC1: 19.686,4.655 21.736,6.03
  rectangle net VCC1: -14.539,4.13 -12.064,5.78
  rectangle net VCC1: -21.214,6.055 -18.914,7.58
  rectangle net NetC6_2: -6.339,2.83 -3.039,3.48
  rectangle net NetC6_2: -6.339,1.63 -3.039,3.205
  rectangle net VCC1: -14.764,-22.17 -12.639,-20.67
  rectangle net VCC1: -20.939,-20.995 -18.639,-19.545
  rectangle net VCC1: -19.964,-8.37 -17.914,-6.995
  rectangle net VCC1: -15.114,-11.145 -13.889,-9.02
  rectangle net VCC: -3.3,-19.95 -0.05,-13.95
  rectangle net VIN: 1.15,-21.95 1.9,-21.15
  rectangle net VCC1: -18.9,-14.225 -8.7,-10.5
  rectangle net VCC1: 1.525,-14.225 19.075,-10.5
  rectangle net VCC1: -3.325,-13.75 1.25,-8.425
  rectangle net VCC1: 0.5,-13.75 9.95,-9.725
  rectangle net VCC1: -11.6,-13.75 -2.775,-10.3
  rectangle net VCC: -5.925,-15.75 -3.3,-13.95
  rectangle net VCC1: -9.875,-14.225 -6.243,-13.475
  region net NetC6_2: -2.264,1.33 -3.039,2.105 -3.039,3.195 -3.739,3.195 -3.739,1.805 -3.264,1.33
  region net NetB1_1: -26.039,11.28 -26.789,10.53 -26.789,6.68 -25.914,5.805 -22.264,5.805 -22.264,7.28 -23.389,8.405 -23.389,10.53 -24.139,11.28
  region net NetB6_1: -11.064,5.83 -11.064,7.805 -10.114,8.755 -10.114,10.88 -9.364,11.63 -7.489,11.63 -6.689,10.83 -6.689,8.73 -9.589,5.83
  region net NetB7_1: 11.511,5.805 10.236,5.805 7.061,8.98 7.061,10.805 7.886,11.63 9.561,11.63 10.636,10.555 11.511,9.68
  region net NetB12_1: 22.836,5.805 22.836,9.355 24.961,11.48 26.736,11.48 27.361,10.855 27.361,9.055 24.111,5.805
  region net NetB11_1: 21.386,-7.27 23.186,-5.47 26.711,-5.47 27.386,-6.145 27.386,-7.97 26.661,-8.695 21.386,-8.695
  region net NetB8_1: 13.286,-7.07 11.686,-5.47 7.586,-5.47 6.936,-6.12 6.936,-8.045 7.686,-8.795 13.286,-8.795
  region net NetB5_1: -12.839,-8.895 -7.489,-8.895 -6.614,-8.02 -6.614,-6.27 -7.539,-5.345 -10.114,-5.345 -12.839,-8.07
  region net NetB2_1: -21.039,-8.87 -26.414,-8.87 -26.964,-8.32 -26.964,-6.233 -26.101,-5.37 -24.339,-5.37 -21.689,-8.02 -21.039,-8.02
  region net NetB3_1: -21.964,-20.52 -23.801,-20.52 -26.814,-23.533 -26.814,-24.745 -25.914,-25.645 -24.239,-25.645 -21.964,-23.37
  region net NetB4_1: -11.589,-21.22 -10.064,-22.745 -10.064,-24.795 -9.064,-25.795 -7.514,-25.795 -6.414,-24.695 -6.414,-22.42 -8.414,-20.42 -11.589,-20.42
  region net NetB9_1: 12.036,-20.52 10.099,-20.52 7.211,-23.408 7.211,-24.77 8.111,-25.67 9.436,-25.67 12.036,-23.07
  region net NetB10_1: 22.186,-21.22 22.336,-21.22 23.786,-22.67 23.786,-24.795 24.786,-25.795 26.536,-25.795 27.461,-24.87 27.461,-22.595 25.286,-20.42 22.186,-20.42
  region net VIN: 1.475,-23.975 1.475,-19.15 4.375,-16.25 7.625,-16.25 7.625,-19.225 7.475,-19.375 7.15,-19.375 2.55,-23.975
Bottom Layer:
  rectangle net VCC1: 15.461,-12.045 18.961,5.63
  rectangle net VCC1: -18.839,-11.945 -15.364,5.93
  rectangle net VCC1: 15.686,-21.12 19.036,-13.045
  rectangle net VCC1: 14.386,-20.77 16.161,-18.92
  rectangle net VCC1: 15.686,-21.345 20.986,-18.995
  rectangle net VCC1: -19.789,4.58 -18.214,7.43
  rectangle net VCC1: -15.789,4.255 -13.589,5.78
  rectangle net VCC1: 16.111,4.655 20.611,6.355
  rectangle net VCC1: -18.814,-21.37 -15.064,-13.045
  rectangle net VCC1: -19.589,-21.02 -18.014,-19.545
  region net VCC1: -19.789,4.58 -18.689,3.48 -18.614,3.48 -18.614,4.83 -18.639,4.855
  region net VCC1: 14.336,7.605 14.336,5.88 16.045,4.17 16.436,5.38 16.436,6.305 15.136,7.605
  region net VCC1: -13.964,-22.17 -14.614,-22.17 -15.514,-21.27 -15.514,-19.72 -15.114,-19.72 -13.964,-20.87

## Silkscreen, mask and mechanical layers (free items; w line width, h text height)
Top Overlay:
  text "B7" at 8.111,11.98 h0.8
  text "B6" at -8.814,11.905 h0.8
  text "B1" at -25.564,11.855 h0.8
  text "B12" at 24.761,11.83 h0.8
  text "1" at -2.789,1.405 h0.8
  text "2" at -2.839,0.88 h0.8
  text "B2" at -25.839,-5.02 h0.8
  text "B11" at 25.586,-5.12 h0.8
  text "B5" at -8.839,-5.195 h0.8
  text "B8" at 8.536,-5.47 h0.8
  text "B3" at -25.689,-22.045 h0.8
  text "B4" at -8.414,-22.233 h0.8
  text "B10" at 24.161,-22.345 h0.8
  text "B9" at 8.161,-22.42 h0.8
Bottom Overlay:
  text "HY" at 15.075,-12.375 h0.8
  text "L1211 TOP V2.0" at 9.275,-12.4 h0.8
Mechanical 1:
  circle w0.013: c25.686,-24.12 r0.9
  circle w0.013: c25.686,-24.12 r1.25
  circle w0.013: c25.686,-24.12 r0.95
  circle w0.013: c8.686,-24.12 r0.9
  circle w0.013: c8.686,-24.12 r1.25
  circle w0.013: c8.686,-24.12 r0.95
  circle w0.013: c8.686,-7.12 r0.9
  circle w0.013: c8.686,-7.12 r1.25
  circle w0.013: c8.686,-7.12 r0.95
  circle w0.013: c25.686,-7.12 r0.9
  circle w0.013: c25.686,-7.12 r1.25
  circle w0.013: c25.686,-7.12 r0.95
  circle w0.013: c8.686,9.88 r0.9
  circle w0.013: c8.686,9.88 r1.25
  circle w0.013: c8.686,9.88 r0.95
  circle w0.013: c25.686,9.88 r0.9
  circle w0.013: c25.686,9.88 r1.25
  circle w0.013: c25.686,9.88 r0.95
  circle w0.013: c-25.314,-24.12 r0.9
  circle w0.013: c-25.314,-24.12 r1.25
  circle w0.013: c-25.314,-24.12 r0.95
  circle w0.013: c-8.314,-24.12 r0.9
  circle w0.013: c-8.314,-24.12 r1.25
  circle w0.013: c-8.314,-24.12 r0.95
  circle w0.013: c-8.314,-7.12 r0.9
  circle w0.013: c-8.314,-7.12 r1.25
  circle w0.013: c-8.314,-7.12 r0.95
  circle w0.013: c-25.314,-7.12 r0.9
  circle w0.013: c-25.314,-7.12 r1.25
  circle w0.013: c-25.314,-7.12 r0.95
  circle w0.013: c-8.314,9.88 r0.9
  circle w0.013: c-8.314,9.88 r1.25
  circle w0.013: c-8.314,9.88 r0.95
  circle w0.013: c-25.314,9.88 r0.9
  circle w0.013: c-25.314,9.88 r1.25
  circle w0.013: c-25.314,9.88 r0.95
  circle w0.013: c8.686,-24.12 r2.25
  circle w0.013: c-8.314,-24.12 r2.25
  circle w0.013: c-25.314,-24.12 r2.25
  circle w0.013: c8.686,-7.12 r2.25
  circle w0.013: c-8.314,-7.12 r2.25
  circle w0.013: c-25.314,-7.12 r2.25
  circle w0.013: c-25.314,9.88 r2.25
  circle w0.013: c-8.314,9.88 r2.25
  circle w0.013: c8.686,9.88 r2.25
  circle w0.013: c25.686,-24.12 r2.25
  circle w0.013: c25.686,-7.12 r2.25
  circle w0.013: c25.686,9.88 r2.25
  circle w0.013: c-25.314,-24.12 r0.4
  circle w0.013: c-8.314,-24.12 r0.4
  circle w0.013: c-8.314,-7.12 r0.4
  circle w0.013: c-25.314,-7.12 r0.4
  circle w0.013: c-8.314,9.88 r0.4
  circle w0.013: c-25.314,9.88 r0.4
  circle w0.013: c25.686,-24.12 r0.4
  circle w0.013: c8.686,-24.12 r0.4
  circle w0.013: c8.686,-7.12 r0.4
  circle w0.013: c25.686,-7.12 r0.4
  circle w0.013: c8.686,9.88 r0.4
  circle w0.013: c25.686,9.88 r0.4
  circle w0.013: c-16.814,9.88 r2.5
  circle w0.013: c-16.814,-24.12 r2.5
  circle w0.013: c17.186,9.88 r2.5
  circle w0.013: c17.186,-24.12 r2.5
  circle w0.013: c-8.314,-5.62 r0.4
  circle w0.013: c-25.314,-5.62 r0.4
  circle w0.013: c8.686,-5.62 r0.4
  circle w0.013: c25.686,-5.62 r0.4
  circle w0.013: c-25.314,-22.62 r0.4
  circle w0.013: c-8.314,-22.62 r0.4
  circle w0.013: c25.686,-22.62 r0.4
  circle w0.013: c8.686,-22.62 r0.4
  circle w0.013: c-8.314,11.38 r0.4
  circle w0.013: c-25.314,11.38 r0.4
  circle w0.013: c8.686,11.38 r0.4
  circle w0.013: c25.686,11.38 r0.4
  circle w0.254: c8.686,9.88 r4
  lines w0.013: -17.127,-21.843 -17.127,-19.877 -16.501,-19.877 -16.501,-21.843 ; -17.127,7.604 -17.127,5.637 -16.501,5.637 -16.501,7.604 ; 16.873,-21.843 16.873,-19.877 17.499,-19.877 ; 16.873,7.604 16.873,5.637 17.499,5.637 17.499,7.604 ; 17.486,-21.855 17.486,-19.89

## Text inside footprints (layer, text, board x,y; h text height)
J1: Bottom Overlay "V" at 2.888,12.054 h1.52; Bottom Overlay "G" at 1.011,12.105 h1.52; Bottom Overlay "D" at -1.303,12.054 h1.52; Bottom Overlay "C" at -3.989,12.08 h1.52